# Altium PCB PCB1.PcbDoc
Units mil, origin at the board's own origin, x right, y up, seen from the top; angles counter-clockwise.
Board outline 6000 x 4000 mil, 2 copper layers (Top Layer, Bottom Layer); 173 components, 160 nets, 974 pads, 0 vias.
Unrouted connection lines stored in the file: 630.
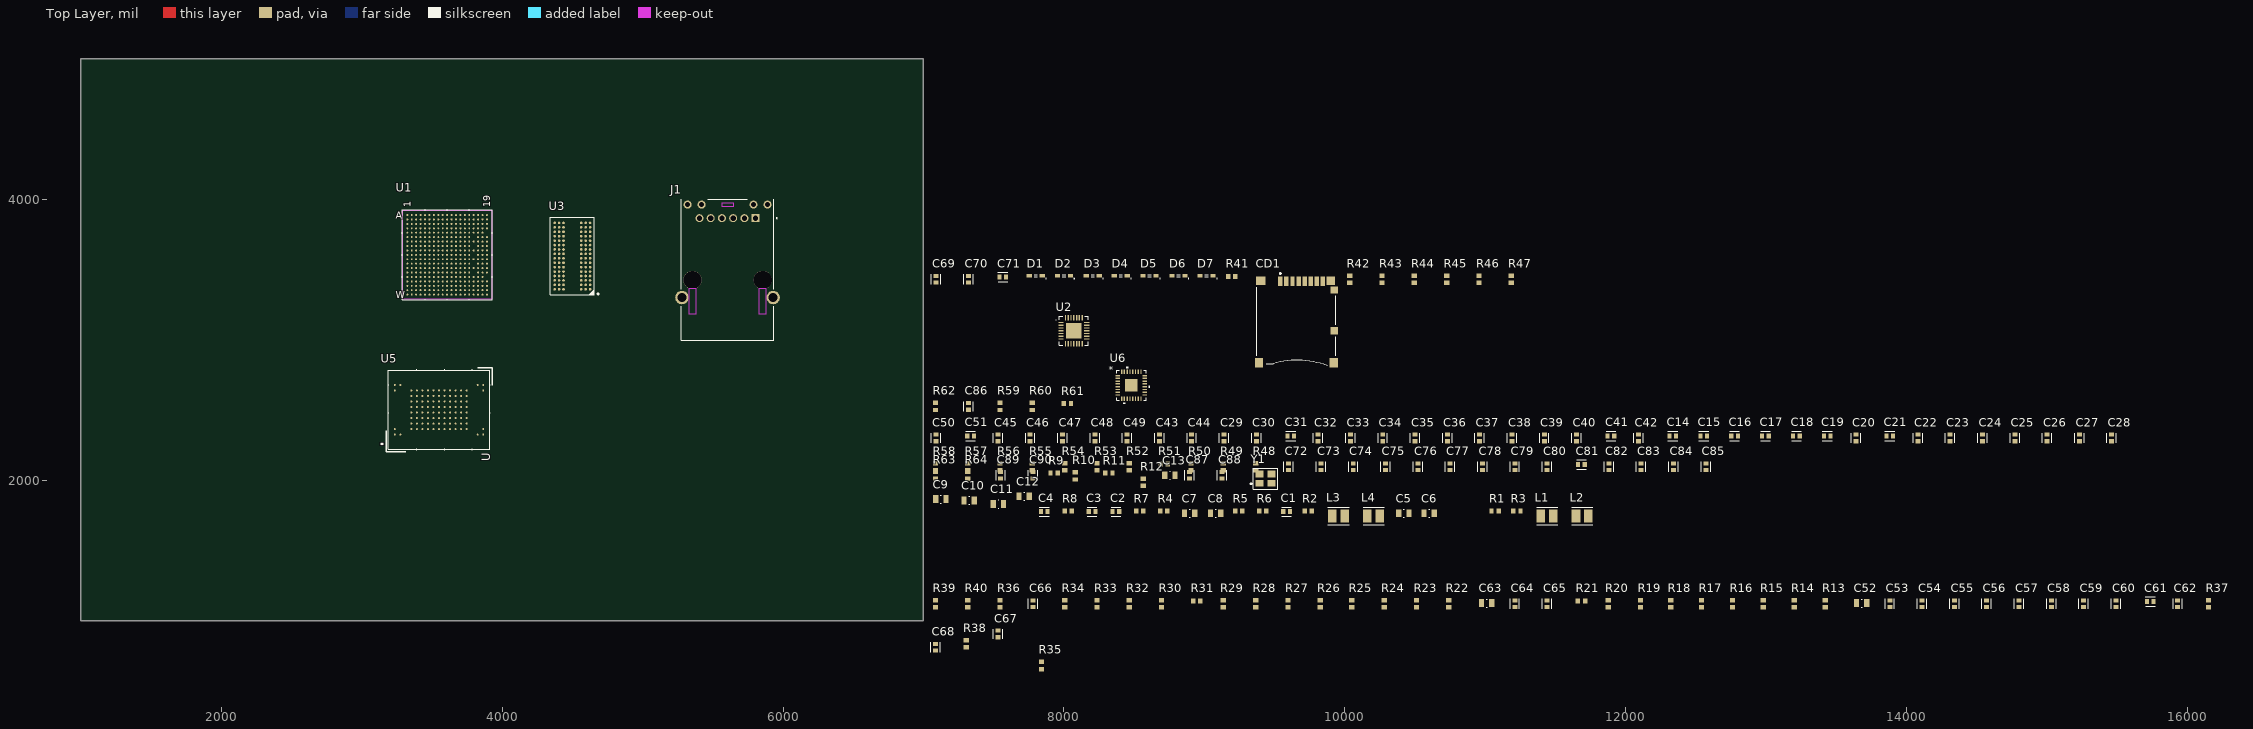
[diagram p0: Top Layer view]
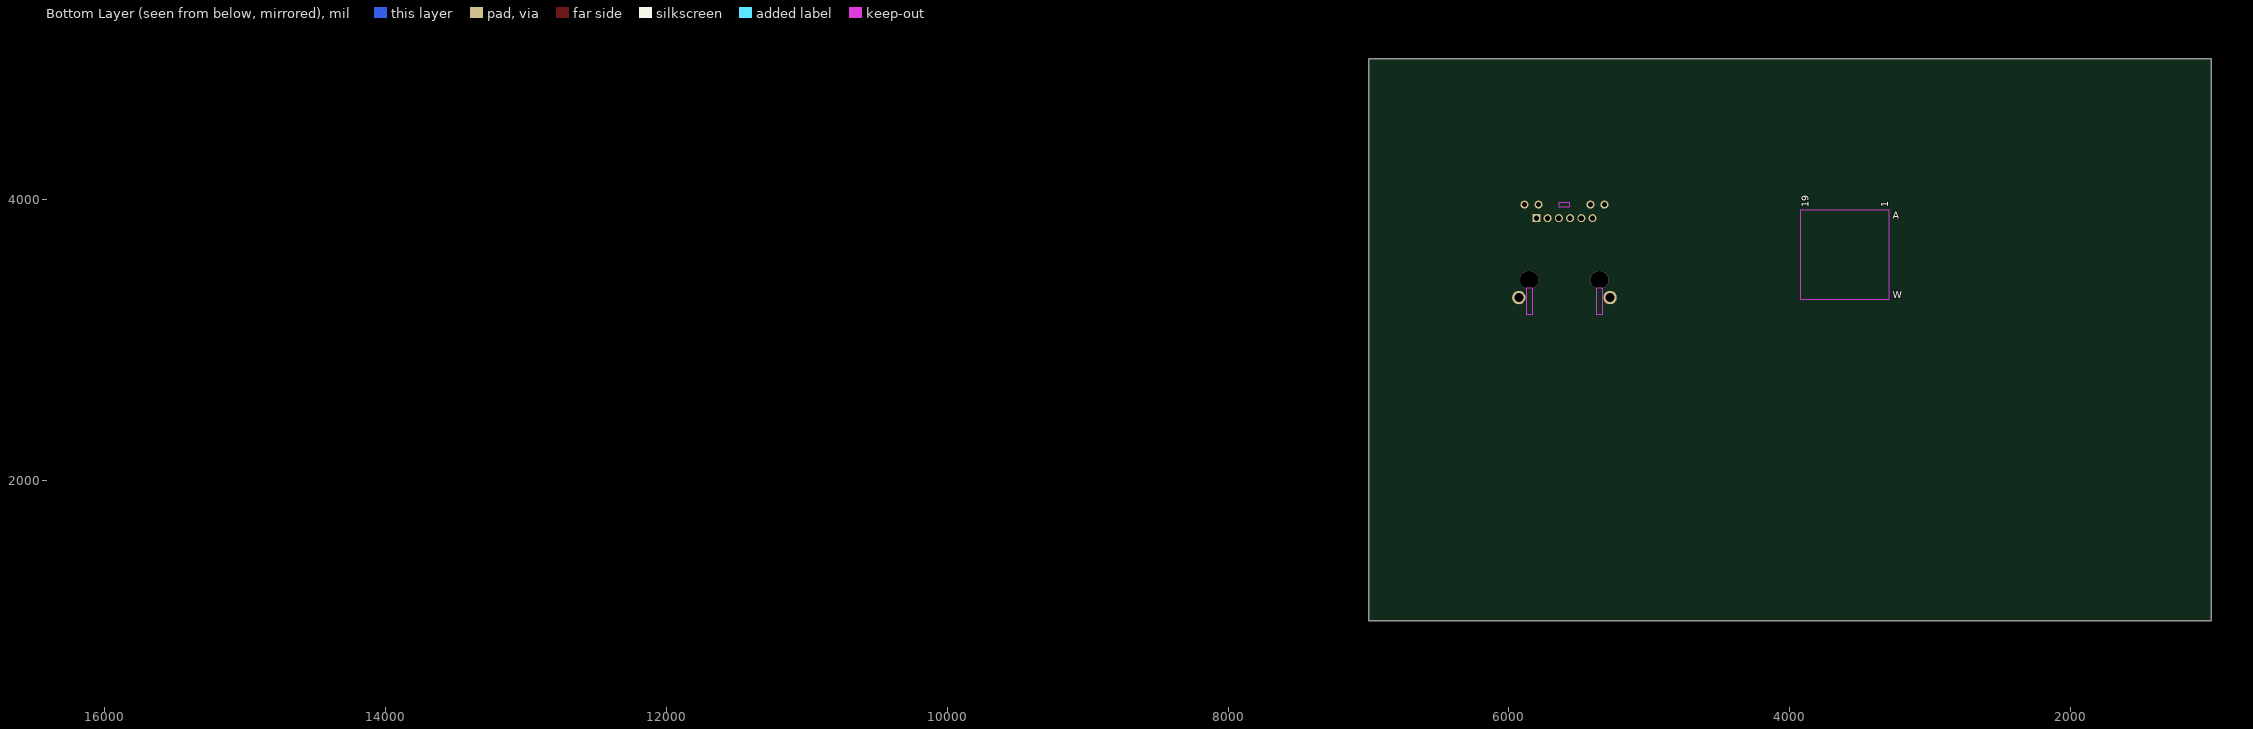
[diagram p1: Bottom Layer view, seen from below]

## Layer stack, top to bottom
Top Solder: solder mask 0.4, Solder Resist, Dk 3.5
Top Layer: signal copper 1.4
Dielectric 1: dielectric 12.6, FR-4, Dk 4.8
Bottom Layer: signal copper 1.4
Bottom Solder: solder mask 0.4, Solder Resist, Dk 3.5

## Board outline
1000,1000 7000,1000 7000,5000 1000,5000

## Design rules (kind name [scope] priority, off if disabled: settings)
Clearance [All] p1: gap=10 ignorepadtopadclearanceinfootprint=FALSE
DiffPairsRouting [All] p1: maxlimit=10 minlimit=10 mostfreqgap=10 toplayer_minwidth=15 toplayer_maxwidth=15 toplayer_prefwidth=15 bottomlayer_minwidth=15 bottomlayer_maxwidth=15 bottomlayer_prefwidth=15 maxuncoupledlength=500
PolygonConnect [All] p1: connectstyle=Relief reliefconductorwidth=10 reliefentries=4 polygonreliefangle="90 Angle" airgapwidth=10
RoutingVias [All] p1: holewidth=28 width=50 viastyle="Through Hole" minholewidth=28 minwidth=50 maxholewidth=28 maxwidth=50
SolderMaskExpansion [All] p1: expansion=4 istentingtop=FALSE
SupplyNets "Schematic Supply Nets_7" [InNet('VCC')] p1: voltage=0.000
SupplyNets "Schematic Supply Nets_6" [InNet('+5V')] p2: voltage=0.000
SupplyNets "Schematic Supply Nets_5" [InNet('0.675V')] p3: voltage=0.000
SupplyNets "Schematic Supply Nets_4" [InNet('GND')] p4: voltage=0.000
SupplyNets "Schematic Supply Nets_3" [InNet('1V8')] p5: voltage=0.000
SupplyNets "Schematic Supply Nets_2" [InNet('3V3')] p6: voltage=0.000
SupplyNets "Schematic Supply Nets_1" [InNet('1V35')] p7: voltage=0.000
SupplyNets "Schematic Supply Nets" [InNet('1V2')] p8: voltage=0.000
Width [All] p1: maxlimit=10 minlimit=10 preferedwidth=10
29 further rules are at their usual default settings.

## Classes and differential pairs
component class MicroSD: C69 C70 C71 CD1 D1 D2 D3 D4 D5 D6 D7 R41 R42 R43 R44 R45 R46 R47
component class Ethernet: C86 C87 C88 C89 C90 J1 R59 R60 R61 R62 R63 R64 U6 Y1
component class eMMC: C72 C73 C74 C75 C76 C77 C78 C79 C80 C81 C82 C83 C84 C85 R48 R49 R50 R51 R52 R53 R54 R55 R56 R57 R58 U5
component class "STM32 Decoupling": C14 C15 C16 C17 C18 C19 C20 C21 C22 C23 C24 C25 C26 C27 C28 C29 C30 C31 C32 C33 C34 C35 C36 C37 C38 C39 C40 C41 C42 C43 C44 C45 C46 C47 C48 C49 C50 C51
component class DDR3: C52 C53 C54 C55 C56 C57 C58 C59 C60 C61 C62 C63 C64 C65 C66 C67 C68 R13 R14 R15 R16 R17 R18 R19 R20 R21 R22 R23 R24 R25 R26 R27 R28 R29 R30 R31 R32 R33 R34 R35 R36 R37 R38 R39 R40 U1 U3
component class Power: C1 C2 C3 C4 C5 C6 C7 C8 C9 C10 C11 C12 C13 L1 L2 L3 L4 R1 R2 R3 R4 R5 R6 R7 R8 R9 R10 R11 R12 U2
differential pair USB2_D: +USB2_D_P -USB2_D_N
differential pair USB1_D: +USB1_D_P -USB1_D_N
differential pair RJ_TD: +RJ_TD_P -RJ_TD_N
differential pair RJ_RD: +RJ_RD_P -RJ_RD_N
differential pair DDR_UDQS: +DDR_UDQS_P -DDR_UDQS_N
differential pair DDR_LDQS: +DDR_LDQS_P -DDR_LDQS_N
differential pair DDR_CLK: +DDR_CLK_P -DDR_CLK_N

## Components (designator, comment, footprint, x,y, rotation, side; value= is the part's Value field where it differs from the comment)
C1 "65p" FP-C0603C-CF-MFG 9585,1775 r0 top value="0.10 μF"
C2 "18p" FP-C0603C-CF-MFG 8370,1775 r0 top value="0.10 μF"
C3 "43p" FP-C0603C-CF-MFG 8200,1775 r0 top value="0.10 μF"
C4 "75p" FP-C0603C-CF-MFG 7860,1775 r0 top value="0.10 μF"
C5 "22u" FP-CC0805-0_85-MFG 10420,1765 r0 top value="100 nF"
C6 "22u" FP-CC0805-0_85-MFG 10600,1765 r0 top value="100 nF"
C7 "22u" FP-CC0805-0_85-MFG 8895,1765 r0 top value="100 nF"
C8 "22u" FP-CC0805-0_85-MFG 9080,1765 r0 top value="100 nF"
C9 "2u2" FP-CC0805-0_85-MFG 7123.58,1865 r0 top value="100 nF"
C10 "2u2" FP-CC0805-0_85-MFG 7325,1855 r0 top value="100 nF"
C11 "2u2" FP-CC0805-0_85-MFG 7533.58,1830 r0 top value="100 nF"
C12 "2u2" FP-CC0805-0_85-MFG 7716.42,1885 r0 top value="100 nF"
C13 "2u2" FP-CC0805-0_85-MFG 8755,2035 r0 top value="100 nF"
C14 "1u" FP-C0603C-CF-MFG 12335,2315 r0 top value="0.10 μF"
C15 "1u" FP-C0603C-CF-MFG 12555,2315 r0 top value="0.10 μF"
C16 "1u" FP-C0603C-CF-MFG 12775,2315 r0 top value="0.10 μF"
C17 "1u" FP-C0603C-CF-MFG 12995,2315 r0 top value="0.10 μF"
C18 "1u" FP-C0603C-CF-MFG 13215,2315 r0 top value="0.10 μF"
C19 "1u" FP-C0603C-CF-MFG 13435,2315 r0 top value="0.10 μF"
C20 "1u" FP-C0603C-CF-MFG 13640,2300 r90 top value="0.10 μF"
C21 "1u" FP-C0603C-CF-MFG 13880,2315 r0 top value="0.10 μF"
C22 "1u" FP-C0603C-CF-MFG 14080,2300 r90 top value="0.10 μF"
C23 "1u" FP-C0603C-CF-MFG 14310,2300 r90 top value="0.10 μF"
C24 "1u" FP-C0603C-CF-MFG 14540,2300 r90 top value="0.10 μF"
C25 "1u" FP-C0603C-CF-MFG 14770,2300 r90 top value="0.10 μF"
C26 "1u" FP-C0603C-CF-MFG 15000,2300 r90 top value="0.10 μF"
C27 "1u" FP-C0603C-CF-MFG 15230,2300 r90 top value="0.10 μF"
C28 "1u" FP-C0603C-CF-MFG 15460,2300 r90 top value="0.10 μF"
C29 "1n" FP-C0603C-CF-MFG 9140,2300 r90 top value="0.10 μF"
C30 "1n" FP-C0603C-CF-MFG 9370,2300 r90 top value="0.10 μF"
C31 "1u" FP-C0603C-CF-MFG 9615,2315 r0 top value="0.10 μF"
C32 "1u" FP-C0603C-CF-MFG 9810,2300 r90 top value="0.10 μF"
C33 "1u" FP-C0603C-CF-MFG 10040,2300 r90 top value="0.10 μF"
C34 "1u" FP-C0603C-CF-MFG 10270,2300 r90 top value="0.10 μF"
C35 "100n" FP-C0603C-CF-MFG 10500,2300 r90 top value="0.10 μF"
C36 "1u" FP-C0603C-CF-MFG 10730,2300 r90 top value="0.10 μF"
C37 "1u" FP-C0603C-CF-MFG 10960,2300 r90 top value="0.10 μF"
C38 "1u" FP-C0603C-CF-MFG 11190,2300 r90 top value="0.10 μF"
C39 "1u" FP-C0603C-CF-MFG 11420,2300 r90 top value="0.10 μF"
C40 "1u" FP-C0603C-CF-MFG 11650,2300 r90 top value="0.10 μF"
C41 "1u" FP-C0603C-CF-MFG 11895,2315 r0 top value="0.10 μF"
C42 "1u" FP-C0603C-CF-MFG 12090,2300 r90 top value="0.10 μF"
C43 "1u" FP-C0603C-CF-MFG 8680,2300 r90 top value="0.10 μF"
C44 "100n" FP-C0603C-CF-MFG 8910,2300 r90 top value="0.10 μF"
C45 "2u2" FP-C0603C-CF-MFG 7530,2300 r90 top value="0.10 μF"
C46 "2u2" FP-C0603C-CF-MFG 7760,2300 r90 top value="0.10 μF"
C47 "1u" FP-C0603C-CF-MFG 7990,2300 r90 top value="0.10 μF"
C48 "2u2" FP-C0603C-CF-MFG 8220,2300 r90 top value="0.10 μF"
C49 "1u" FP-C0603C-CF-MFG 8450,2300 r90 top value="0.10 μF"
C50 "1u" FP-C0603C-CF-MFG 7090,2300 r90 top value="0.10 μF"
C51 "100n" FP-C0603C-CF-MFG 7335,2315 r0 top value="0.10 μF"
C52 "10u" FP-CC0805-0_85-MFG 13680,1125 r0 top value="100 nF"
C53 "100n" FP-C0603C-CF-MFG 13880,1120 r90 top value="0.10 μF"
C54 "100n" FP-C0603C-CF-MFG 14110,1120 r90 top value="0.10 μF"
C55 "100n" FP-C0603C-CF-MFG 14340,1120 r90 top value="0.10 μF"
C56 "100n" FP-C0603C-CF-MFG 14570,1120 r90 top value="0.10 μF"
C57 "100n" FP-C0603C-CF-MFG 14800,1120 r90 top value="0.10 μF"
C58 "100n" FP-C0603C-CF-MFG 15030,1120 r90 top value="0.10 μF"
C59 "100n" FP-C0603C-CF-MFG 15260,1120 r90 top value="0.10 μF"
C60 "100n" FP-C0603C-CF-MFG 15490,1120 r90 top value="0.10 μF"
C61 "100n" FP-C0603C-CF-MFG 15735,1135 r0 top value="0.10 μF"
C62 "100n" FP-C0603C-CF-MFG 15930,1120 r90 top value="0.10 μF"
C63 "10u" FP-CC0805-0_85-MFG 11010,1125 r0 top value="100 nF"
C64 "100n" FP-C0603C-CF-MFG 11210,1120 r90 top value="0.10 μF"
C65 "100n" FP-C0603C-CF-MFG 11440,1120 r90 top value="0.10 μF"
C66 "100n" FP-C0603C-CF-MFG 7780,1120 r90 top value="0.10 μF"
C67 "100n" FP-C0603C-CF-MFG 7530,905 r90 top value="0.10 μF"
C68 "10n" FP-C0603C-CF-MFG 7085,810 r90 top value="0.10 μF"
C69 "0.1u" FP-C0603C-CF-MFG 7090,3430 r90 top value="0.10 μF"
C70 "0.1u" FP-C0603C-CF-MFG 7320,3430 r90 top value="0.10 μF"
C71 "0.1u" FP-C0603C-CF-MFG 7565,3445 r0 top value="0.10 μF"
C72 "0.1u" FP-C0603C-CF-MFG 9600,2095 r90 top value="0.10 μF"
C73 "0.1u" FP-C0603C-CF-MFG 9830,2095 r90 top value="0.10 μF"
C74 "0.1u" FP-C0603C-CF-MFG 10060,2095 r90 top value="0.10 μF"
C75 "0.1u" FP-C0603C-CF-MFG 10290,2095 r90 top value="0.10 μF"
C76 "0.1u" FP-C0603C-CF-MFG 10520,2095 r90 top value="0.10 μF"
C77 "0.1u" FP-C0603C-CF-MFG 10750,2095 r90 top value="0.10 μF"
C78 "0.1u" FP-C0603C-CF-MFG 10980,2095 r90 top value="0.10 μF"
C79 "0.1u" FP-C0603C-CF-MFG 11210,2095 r90 top value="0.10 μF"
C80 "0.1u" FP-C0603C-CF-MFG 11440,2095 r90 top value="0.10 μF"
C81 "0.1u" FP-C0603C-CF-MFG 11685,2110 r0 top value="0.10 μF"
C82 "0.1u" FP-C0603C-CF-MFG 11880,2095 r90 top value="0.10 μF"
C83 "0.1u" FP-C0603C-CF-MFG 12110,2095 r90 top value="0.10 μF"
C84 "0.1u" FP-C0603C-CF-MFG 12340,2095 r90 top value="0.10 μF"
C85 "0.1u" FP-C0603C-CF-MFG 12570,2095 r90 top value="0.10 μF"
C86 "2n" FP-C0603C-CF-MFG 7320,2525 r90 top value="0.10 μF"
C87 "75p" FP-C0603C-CF-MFG 8895,2035 r90 top value="0.10 μF"
C88 "75p" FP-C0603C-CF-MFG 9125,2035 r90 top value="0.10 μF"
C89 "2n" FP-C0603C-CF-MFG 7550,2035 r90 top value="0.10 μF"
C90 "2n" FP-C0603C-CF-MFG 7780,2035 r90 top value="0.10 μF"
CD1 "502774-0891" MOLX-502774-0891_V 9655,3125 r0 top
D1 "DESD5V0U1BA-7" SOD-323 7800,3455 r0 top
D2 "DESD5V0U1BA-7" SOD-323 8000,3455 r0 top
D3 "DESD5V0U1BA-7" SOD-323 8205,3455 r0 top
D4 "DESD5V0U1BA-7" SOD-323 8405,3455 r0 top
D5 "DESD5V0U1BA-7" SOD-323 8610,3455 r0 top
D6 "DESD5V0U1BA-7" SOD-323 8815,3455 r0 top
D7 "DESD5V0U1BA-7" SOD-323 9015,3455 r0 top
J1 "RJMG163118101NR" AMPHENOL_RJMG163118101NR 5605,3425 r0 top
L1 "1u5" FP-LQM2HPN_G0-IPC_A 11440,1745 r0 top
L2 "1u5" FP-LQM2HPN_G0-IPC_A 11690,1745 r0 top
L3 "1u5" FP-LQM2HPN_G0-IPC_A 9955,1745 r0 top
L4 "1u5" FP-LQM2HPN_G0-IPC_A 10205,1745 r0 top
R1 "15k6" RESC1609X50X30NL8T20 11070,1780 r0 top
R2 "68k" RESC1609X50X30NL8T20 9740,1780 r0 top
R3 "54k4" RESC1609X50X30NL8T20 11225,1780 r0 top
R4 "68k" RESC1609X50X30NL8T20 8710,1780 r0 top
R5 "13k6" RESC1609X50X30NL8T20 9245,1780 r0 top
R6 "24k" RESC1609X50X30NL8T20 9415,1780 r0 top
R7 "68k" RESC1609X50X30NL8T20 8540,1780 r0 top
R8 "68k" RESC1609X50X30NL8T20 8030,1780 r0 top
R9 "20k" RESC1609X50X30NL8T20 7930,2050 r0 top
R10 "20k" RESC1609X50X30NL8T20 8080,2030 r90 top
R11 "20k" RESC1609X50X30NL8T20 8320,2050 r0 top
R12 "20k" RESC1609X50X30NL8T20 8565,1984.41 r90 top
R13 "33" RESC1609X50X30NL8T20 13420,1120 r90 top
R14 "33" RESC1609X50X30NL8T20 13200,1120 r90 top
R15 "33" RESC1609X50X30NL8T20 12980,1120 r90 top
R16 "33" RESC1609X50X30NL8T20 12760,1120 r90 top
R17 "33" RESC1609X50X30NL8T20 12540,1120 r90 top
R18 "33" RESC1609X50X30NL8T20 12320,1120 r90 top
R19 "33" RESC1609X50X30NL8T20 12105,1120 r90 top
R20 "33" RESC1609X50X30NL8T20 11875,1120 r90 top
R21 "33" RESC1609X50X30NL8T20 11685,1140 r0 top
R22 "33" RESC1609X50X30NL8T20 10740,1120 r90 top
R23 "33" RESC1609X50X30NL8T20 10510,1120 r90 top
R24 "33" RESC1609X50X30NL8T20 10280,1120 r90 top
R25 "33" RESC1609X50X30NL8T20 10050,1120 r90 top
R26 "33" RESC1609X50X30NL8T20 9825,1120 r90 top
R27 "33" RESC1609X50X30NL8T20 9595,1120 r90 top
R28 "33" RESC1609X50X30NL8T20 9365,1120 r90 top
R29 "100" RESC1609X50X30NL8T20 9135,1120 r90 top
R30 "33" RESC1609X50X30NL8T20 8695,1120 r90 top
R31 "33" RESC1609X50X30NL8T20 8945,1140 r0 top
R32 "33" RESC1609X50X30NL8T20 8465,1120 r90 top
R33 "33" RESC1609X50X30NL8T20 8235,1120 r90 top
R34 "33" RESC1609X50X30NL8T20 8005,1120 r90 top
R35 "33" RESC1609X50X30NL8T20 7840,680 r90 top
R36 "240" RESC1609X50X30NL8T20 7545,1120 r90 top
R37 "240" RESC1609X50X30NL8T20 16150,1120 r90 top
R38 "10k" RESC1609X50X30NL8T20 7305,834.41 r90 top
R39 "10k" RESC1609X50X30NL8T20 7085,1120 r90 top
R40 "240" RESC1609X50X30NL8T20 7315,1120 r90 top
R41 "4.7k" RESC1609X50X30NL8T20 9195,3450 r0 top
R42 "4.7k" RESC1609X50X30NL8T20 10035,3430 r90 top
R43 "4.7k" RESC1609X50X30NL8T20 10265,3430 r90 top
R44 "4.7k" RESC1609X50X30NL8T20 10495,3430 r90 top
R45 "4.7k" RESC1609X50X30NL8T20 10725,3430 r90 top
R46 "4.7k" RESC1609X50X30NL8T20 10955,3430 r90 top
R47 "4.7k" RESC1609X50X30NL8T20 11185,3430 r90 top
R48 "4.7k" RESC1609X50X30NL8T20 9365,2095 r90 top
R49 "4.7k" RESC1609X50X30NL8T20 9135,2095 r90 top
R50 "4.7k" RESC1609X50X30NL8T20 8905,2095 r90 top
R51 "4.7k" RESC1609X50X30NL8T20 8715,2115 r0 top
R52 "4.7k" RESC1609X50X30NL8T20 8465,2095 r90 top
R53 "4.7k" RESC1609X50X30NL8T20 8235,2095 r90 top
R54 "4.7k" RESC1609X50X30NL8T20 8005,2095 r90 top
R55 "4.7k" RESC1609X50X30NL8T20 7775,2095 r90 top
R56 "4.7k" RESC1609X50X30NL8T20 7545,2095 r90 top
R57 "4.7k" RESC1609X50X30NL8T20 7315,2095 r90 top
R58 "4.7k" RESC1609X50X30NL8T20 7085,2095 r90 top
R59 "4.7k" RESC1609X50X30NL8T20 7545,2525 r90 top
R60 "4.7k" RESC1609X50X30NL8T20 7775,2525 r90 top
R61 "4.7k" RESC1609X50X30NL8T20 8025,2545 r0 top
R62 "4.7k" RESC1609X50X30NL8T20 7085,2525 r90 top
R63 "510" RESC1609X50X30NL8T20 7085,2035 r90 top
R64 "510" RESC1609X50X30NL8T20 7315,2035 r90 top
U1 "STM32MP151AAB3" LFBGA354_16X16_STM 3608.5,3604.02 r0 top
U2 "MAX20029CATIAV+" "QUADBUCK QFN28" 8070.31,3063.5 r0 top
U3 "MT41K64M16TW-107 IT:J" MICT-TW-96 4500,3595 r180 top
U5 "IS21ES08GA-JQLI-TR" FBGA100_ISI 3550.63,2500.95 r90 top
U6 "DP83826IRHBR" VQFN32_RHB_TEX 8480,2675 r0 top
Y1 "7M-25.000MEEQ-T" FP-7M-MFG 9435,2010 r0 top

## Footprints (in the part's own frame and the unit in brackets; to place one, negate y for a bottom-side part, rotate by r counter-clockwise, add the part's x,y. Pads: shape width x height; smd on the part's side, far side on the other; paste and mask are expansions set on the pad)
AMPHENOL_RJMG163118101NR [mm]
  round 1.448 hole 0.94: L1(7.23,13.63) L2(4.69,13.63) L3(-4.69,13.63) L4(-7.23,13.63) R2(3.045,11.18) R3(1.015,11.18) R4(-1.015,11.18) R5(-3.045,11.18) R6(-5.075,11.18)
  rect 1.448x1.448 hole 0.94: R1(5.075,11.18)
  round 2.43 hole 1.62: S1(-8.25,-3.18) S2(8.25,-3.18)
  round 3.3 hole 3.3 unplated: ""(-6.35,0) ""(6.35,0)
  Keep-Out Layer region: 1,13.2 -1,13.2 -1,14 1,14
  Keep-Out Layer region: 6.95,-6.2 5.75,-6.2 5.75,-1.5 6.95,-1.5
  Keep-Out Layer region: -5.75,-6.2 -6.95,-6.2 -6.95,-1.5 -5.75,-1.5
  silkscreen extent -8.35,-10.86 9,14.57
FBGA100_ISI [mil]
  round 14 smd paste+0 mask+0: A1(-177.16,314.96) A2(-137.8,314.96) A9(137.79,314.96) A10(177.16,314.96) B1(-177.16,275.59) B10(177.16,275.59) D2(-137.8,196.85) D3(-98.43,196.85) D4(-59.06,196.85) D5(-19.68,196.85) D6(19.68,196.85) D7(59.05,196.85) D8(98.42,196.85) D9(137.79,196.85) E2(-137.8,157.48) E3(-98.43,157.48) E4(-59.06,157.48) E5(-19.68,157.48) E6(19.68,157.48) E7(59.05,157.48) E8(98.42,157.48) E9(137.79,157.48) F2(-137.8,118.11) F3(-98.43,118.11) F4(-59.06,118.11) F5(-19.68,118.11) F6(19.68,118.11) F7(59.05,118.11) F8(98.42,118.11) F9(137.79,118.11) G2(-137.8,78.74) G3(-98.43,78.74) G4(-59.06,78.74) G5(-19.68,78.74) G6(19.68,78.74) G7(59.05,78.74) G8(98.42,78.74) G9(137.79,78.74) H2(-137.8,39.37) H3(-98.43,39.37) H4(-59.06,39.37) H5(-19.68,39.37) H6(19.68,39.37) H7(59.05,39.37) H8(98.42,39.37) H9(137.79,39.37) J2(-137.8,0) J3(-98.43,0) J4(-59.06,0) J5(-19.68,0) J6(19.68,0) J7(59.05,0) J8(98.42,0) J9(137.79,0) K2(-137.8,-39.37) K3(-98.43,-39.37) K4(-59.06,-39.37) K5(-19.68,-39.37) K6(19.68,-39.37) K7(59.05,-39.37) K8(98.42,-39.37) K9(137.79,-39.37) L2(-137.8,-78.74) L3(-98.43,-78.74) L4(-59.06,-78.74) L5(-19.68,-78.74) L6(19.68,-78.74) L7(59.05,-78.74) L8(98.42,-78.74) L9(137.79,-78.74) M2(-137.8,-118.11) M3(-98.43,-118.11) M4(-59.06,-118.11) M5(-19.68,-118.11) M6(19.68,-118.11) M7(59.05,-118.11) M8(98.42,-118.11) M9(137.79,-118.11) N2(-137.8,-157.48) N3(-98.43,-157.48) N4(-59.06,-157.48) N5(-19.68,-157.48) N6(19.68,-157.48) N7(59.05,-157.48) N8(98.42,-157.48) N9(137.79,-157.48) P2(-137.8,-196.85) P3(-98.43,-196.85) P4(-59.06,-196.85) P5(-19.68,-196.85) P6(19.68,-196.85) P7(59.05,-196.85) P8(98.42,-196.85) P9(137.79,-196.85) T1(-177.16,-275.59) T10(177.16,-275.59) U1(-177.16,-314.96) U2(-137.8,-314.96) U9(137.79,-314.96) U10(177.16,-314.96)
  silkscreen extent -300,-380 300,375, body extent -277,-356 277,356, height 55
FP-7M-MFG [mm]
  rect 1.4x1.2 smd paste+0 mask+0: 1(-1.1,-0.85) 2(1.1,-0.85) 3(1.1,0.85) 4(-1.1,0.85)
  silkscreen extent -2.75,-1.9 2.25,1.9, body extent -1.9,-1.55 1.9,1.55, height 0.25
FP-C0603C-CF-MFG [mm]
  rect 0.75x0.9 smd paste+0 mask+0: 1(-0.6,0) 2(0.6,0)
  silkscreen extent -0.87,-0.85 0.88,0.85, body extent -1.2,-0.6 1.2,0.6, height 0.25
FP-CC0805-0_85-MFG [mm]
  rect 0.95x1.4 smd paste+0 mask+0: 1(-0.925,0) 2(0.925,0)
  silkscreen extent -0.08,-0.72 0.08,0.72, body extent -1.6,-1.05 1.6,1.05, height 0.25
FP-LQM2HPN_G0-IPC_A [mil]
  rect 61.22x90.8 smd paste+0 mask+0: 1(-44.32,0) 2(44.32,0)
  silkscreen extent -75,-61 75,61, body extent -95,-65 95,65, height 10
LFBGA354_16X16_STM [mil]
  round 14 smd paste+0 mask+0: A1(-283.46,283.46) A2(-251.97,283.46) A3(-220.47,283.46) A4(-188.98,283.46) A5(-157.48,283.46) A6(-125.98,283.46) A7(-94.49,283.46) A8(-62.99,283.46) A9(-31.5,283.46) A10(0,283.46) A11(31.5,283.46) A12(62.99,283.46) A13(94.49,283.46) A14(125.98,283.46) A15(157.48,283.46) A16(188.98,283.46) A17(220.47,283.46) A18(251.97,283.46) A19(283.46,283.46) B1(-283.46,251.97) B2(-251.97,251.97) B3(-220.47,251.97) B4(-188.98,251.97) B5(-157.48,251.97) B6(-125.98,251.97) B7(-94.49,251.97) B8(-62.99,251.97) B9(-31.5,251.97) B10(0,251.97) B11(31.5,251.97) B12(62.99,251.97) B13(94.49,251.97) B14(125.98,251.97) B15(157.48,251.97) B16(188.98,251.97) B17(220.47,251.97) B18(251.97,251.97) B19(283.46,251.97) C1(-283.46,220.47) C2(-251.97,220.47) C3(-220.47,220.47) C4(-188.98,220.47) C5(-157.48,220.47) C6(-125.98,220.47) C7(-94.49,220.47) C8(-62.99,220.47) C9(-31.5,220.47) C10(0,220.47) C11(31.5,220.47) C12(62.99,220.47) C13(94.49,220.47) C14(125.98,220.47) C15(157.48,220.47) C16(188.98,220.47) C17(220.47,220.47) C18(251.97,220.47) C19(283.46,220.47) D1(-283.46,188.98) D2(-251.97,188.98) D3(-220.47,188.98) D4(-188.98,188.98) D5(-157.48,188.98) D6(-125.98,188.98) D7(-94.49,188.98) D8(-62.99,188.98) D9(-31.5,188.98) D10(0,188.98) D11(31.5,188.98) D12(62.99,188.98) D13(94.49,188.98) D14(125.98,188.98) D15(157.48,188.98) D16(188.98,188.98) D17(220.47,188.98) D18(251.97,188.98) D19(283.46,188.98) E1(-283.46,157.48) E2(-251.97,157.48) E3(-220.47,157.48) E4(-188.98,157.48) E5(-157.48,157.48) E6(-125.98,157.48) E7(-94.49,157.48) E8(-62.99,157.48) E9(-31.5,157.48) E10(0,157.48) E11(31.5,157.48) E12(62.99,157.48) E13(94.49,157.48) E14(125.98,157.48) E15(157.48,157.48) E16(188.98,157.48) E17(220.47,157.48) E18(251.97,157.48) F1(-283.46,125.98) F2(-251.97,125.98) F3(-220.47,125.98) F4(-188.98,125.98) F5(-157.48,125.98) F6(-125.98,125.98) F7(-94.49,125.98) F8(-62.99,125.98) F9(-31.5,125.98) F10(0,125.98) F11(31.5,125.98) F12(62.99,125.98) F13(94.49,125.98) F14(125.98,125.98) F15(157.48,125.98) F17(220.47,125.98) F18(251.97,125.98) F19(283.46,125.98) G1(-283.46,94.49) G2(-251.97,94.49) G3(-220.47,94.49) G4(-188.98,94.49) G5(-157.48,94.49) G6(-125.98,94.49) G7(-94.49,94.49) G8(-62.99,94.49) G9(-31.5,94.49) G10(0,94.49) G11(31.5,94.49) G12(62.99,94.49) G13(94.49,94.49) G14(125.98,94.49) G15(157.48,94.49) G16(188.98,94.49) G17(220.47,94.49) G18(251.97,94.49) G19(283.46,94.49) H1(-283.46,62.99) H2(-251.97,62.99) H3(-220.47,62.99) H4(-188.98,62.99) H5(-157.48,62.99) H6(-125.98,62.99) H7(-94.49,62.99) H8(-62.99,62.99) H9(-31.5,62.99) H10(0,62.99) H11(31.5,62.99) H12(62.99,62.99) H13(94.49,62.99) H14(125.98,62.99) H15(157.48,62.99) H17(220.47,62.99) H18(251.97,62.99) H19(283.46,62.99) J1(-283.46,31.5) J2(-251.97,31.5) J3(-220.47,31.5) J4(-188.98,31.5) J5(-157.48,31.5) J6(-125.98,31.5) J7(-94.49,31.5) J8(-62.99,31.5) J9(-31.5,31.5) J10(0,31.5) J11(31.5,31.5) J12(62.99,31.5) J13(94.49,31.5) J14(125.98,31.5) J15(157.48,31.5) J16(188.98,31.5) J17(220.47,31.5) J18(251.97,31.5) J19(283.46,31.5) K1(-283.46,0) K2(-251.97,0) K3(-220.47,0) K4(-188.98,0) K5(-157.48,0) K6(-125.98,0) K7(-94.49,0) K8(-62.99,0) K9(-31.5,0) K10(0,0) K11(31.5,0) K12(62.99,0) K13(94.49,0) K14(125.98,0) K15(157.48,0) K17(220.47,0) K18(251.97,0) K19(283.46,0) L1(-283.46,-31.5) L2(-251.97,-31.5) L3(-220.47,-31.5) L4(-188.98,-31.5) L5(-157.48,-31.5) L6(-125.98,-31.5) L7(-94.49,-31.5) L8(-62.99,-31.5) L9(-31.5,-31.5) L10(0,-31.5) L11(31.5,-31.5) L12(62.99,-31.5) L13(94.49,-31.5) L14(125.98,-31.5) L15(157.48,-31.5) L16(188.98,-31.5) L17(220.47,-31.5) L18(251.97,-31.5) L19(283.46,-31.5) M1(-283.46,-62.99) M2(-251.97,-62.99) M3(-220.47,-62.99) M4(-188.98,-62.99) M5(-157.48,-62.99) M6(-125.98,-62.99) M7(-94.49,-62.99) M8(-62.99,-62.99) M9(-31.5,-62.99) M10(0,-62.99) M11(31.5,-62.99) M12(62.99,-62.99) M13(94.49,-62.99) M14(125.98,-62.99) M15(157.48,-62.99) M17(220.47,-62.99) M18(251.97,-62.99) M19(283.46,-62.99) N1(-283.46,-94.49) N2(-251.97,-94.49) N3(-220.47,-94.49) N4(-188.98,-94.49) N5(-157.48,-94.49) N6(-125.98,-94.49) N7(-94.49,-94.49) N8(-62.99,-94.49) N9(-31.5,-94.49) N10(0,-94.49) N11(31.5,-94.49) N12(62.99,-94.49) N13(94.49,-94.49) N14(125.98,-94.49) N15(157.48,-94.49) N16(188.98,-94.49) N17(220.47,-94.49) N18(251.97,-94.49) N19(283.46,-94.49) P1(-283.46,-125.98) P2(-251.97,-125.98) P3(-220.47,-125.98) P4(-188.98,-125.98) P5(-157.48,-125.98) P6(-125.98,-125.98) P7(-94.49,-125.98) P8(-62.99,-125.98) P9(-31.5,-125.98) P10(0,-125.98) P11(31.5,-125.98) P12(62.99,-125.98) P13(94.49,-125.98) P14(125.98,-125.98) P15(157.48,-125.98) P17(220.47,-125.98) P18(251.97,-125.98) P19(283.46,-125.98) R1(-283.46,-157.48) R2(-251.97,-157.48) R3(-220.47,-157.48) R4(-188.98,-157.48) R5(-157.48,-157.48) R6(-125.98,-157.48) R7(-94.49,-157.48) R8(-62.99,-157.48) R9(-31.5,-157.48) R10(0,-157.48) R11(31.5,-157.48) R12(62.99,-157.48) R13(94.49,-157.48) R14(125.98,-157.48) R15(157.48,-157.48) R16(188.98,-157.48) R17(220.47,-157.48) R18(251.97,-157.48) T1(-283.46,-188.98) T2(-251.97,-188.98) T3(-220.47,-188.98) T4(-188.98,-188.98) T5(-157.48,-188.98) T6(-125.98,-188.98) T7(-94.49,-188.98) T8(-62.99,-188.98) T9(-31.5,-188.98) T10(0,-188.98) T11(31.5,-188.98) T12(62.99,-188.98) T13(94.49,-188.98) T14(125.98,-188.98) T15(157.48,-188.98) T16(188.98,-188.98) T17(220.47,-188.98) T18(251.97,-188.98) T19(283.46,-188.98) U1(-283.46,-220.47) U2(-251.97,-220.47) U3(-220.47,-220.47) U4(-188.98,-220.47) U5(-157.48,-220.47) U6(-125.98,-220.47) U7(-94.49,-220.47) U8(-62.99,-220.47) U9(-31.5,-220.47) U10(0,-220.47) U11(31.5,-220.47) U12(62.99,-220.47) U13(94.49,-220.47) U14(125.98,-220.47) U15(157.48,-220.47) U16(188.98,-220.47) U17(220.47,-220.47) U18(251.97,-220.47) U19(283.46,-220.47) V1(-283.46,-251.97) V2(-251.97,-251.97) V3(-220.47,-251.97) V4(-188.98,-251.97) V5(-157.48,-251.97) V6(-125.98,-251.97) V7(-94.49,-251.97) V8(-62.99,-251.97) V9(-31.5,-251.97) V10(0,-251.97) V11(31.5,-251.97) V12(62.99,-251.97) V13(94.49,-251.97) V14(125.98,-251.97) V15(157.48,-251.97) V16(188.98,-251.97) V17(220.47,-251.97) V18(251.97,-251.97) V19(283.46,-251.97) W1(-283.46,-283.46) W2(-251.97,-283.46) W3(-220.47,-283.46) W4(-188.98,-283.46) W5(-157.48,-283.46) W6(-125.98,-283.46) W7(-94.49,-283.46) W8(-62.99,-283.46) W9(-31.5,-283.46) W10(0,-283.46) W11(31.5,-283.46) W12(62.99,-283.46) W13(94.49,-283.46) W14(125.98,-283.46) W15(157.48,-283.46) W16(188.98,-283.46) W17(220.47,-283.46) W18(251.97,-283.46) W19(283.46,-283.46)
  Keep-Out Layer region: -316.71,-316.71 -316.71,316.71 316.71,316.71 316.71,-316.71
  silkscreen extent -325,-325 325,325, body extent -315,-315 315,315, height 51
MICT-TW-96 [mm] "BGA, 96-Balls, Body 8x14mm, Pitch 0.8mm"
  round 0.47 smd mask-0.025: A1(-3.2,6) A2(-2.4,6) A3(-1.6,6) A7(1.6,6) A8(2.4,6) A9(3.2,6) B1(-3.2,5.2) B2(-2.4,5.2) B3(-1.6,5.2) B7(1.6,5.2) B8(2.4,5.2) B9(3.2,5.2) C1(-3.2,4.4) C2(-2.4,4.4) C3(-1.6,4.4) C7(1.6,4.4) C8(2.4,4.4) C9(3.2,4.4) D1(-3.2,3.6) D2(-2.4,3.6) D3(-1.6,3.6) D7(1.6,3.6) D8(2.4,3.6) D9(3.2,3.6) E1(-3.2,2.8) E2(-2.4,2.8) E3(-1.6,2.8) E7(1.6,2.8) E8(2.4,2.8) E9(3.2,2.8) F1(-3.2,2) F2(-2.4,2) F3(-1.6,2) F7(1.6,2) F8(2.4,2) F9(3.2,2) G1(-3.2,1.2) G2(-2.4,1.2) G3(-1.6,1.2) G7(1.6,1.2) G8(2.4,1.2) G9(3.2,1.2) H1(-3.2,0.4) H2(-2.4,0.4) H3(-1.6,0.4) H7(1.6,0.4) H8(2.4,0.4) H9(3.2,0.4) J1(-3.2,-0.4) J2(-2.4,-0.4) J3(-1.6,-0.4) J7(1.6,-0.4) J8(2.4,-0.4) J9(3.2,-0.4) K1(-3.2,-1.2) K2(-2.4,-1.2) K3(-1.6,-1.2) K7(1.6,-1.2) K8(2.4,-1.2) K9(3.2,-1.2) L1(-3.2,-2) L2(-2.4,-2) L3(-1.6,-2) L7(1.6,-2) L8(2.4,-2) L9(3.2,-2) M1(-3.2,-2.8) M2(-2.4,-2.8) M3(-1.6,-2.8) M7(1.6,-2.8) M8(2.4,-2.8) M9(3.2,-2.8) N1(-3.2,-3.6) N2(-2.4,-3.6) N3(-1.6,-3.6) N7(1.6,-3.6) N8(2.4,-3.6) N9(3.2,-3.6) P1(-3.2,-4.4) P2(-2.4,-4.4) P3(-1.6,-4.4) P7(1.6,-4.4) P8(2.4,-4.4) P9(3.2,-4.4) R1(-3.2,-5.2) R2(-2.4,-5.2) R3(-1.6,-5.2) R7(1.6,-5.2) R8(2.4,-5.2) R9(3.2,-5.2) T1(-3.2,-6) T2(-2.4,-6) T3(-1.6,-6) T7(1.6,-6) T8(2.4,-6) T9(3.2,-6)
  silkscreen extent -4.78,-7 4,7, body extent -4,-7 4,7, height 1.2
MOLX-502774-0891_V [mm] "SMD, 14-Leads, Body 15x14.3mm, Pitch 1.1mm"
  rect 0.8x1.68 smd: 1(-2.9,7.385) 2(-1.8,7.385) 3(-0.7,7.385) 4(0.4,7.385) 5(1.5,7.385) 6(2.6,7.385) 7(3.7,7.385) 8(4.8,7.385)
  rect 1.29x1.3 smd: 9(6.855,5.825)
  rect 1.29x1.4 smd: 10(6.855,-1.575)
  rect 1.5x1.7 smd: 11(6.75,-7.375) 12(-6.75,-7.375)
  rect 1.7x1.5 smd: 13(-6.45,7.475)
  rect 1.6x1.5 smd: 14(6.21,7.475)
  silkscreen extent -7.15,-7.88 7.15,8.9, body extent -7.15,-8 7.15,8, height 1.78
"QUADBUCK QFN28" [mil]
  rect 38x10 smd paste+0 mask+0: 1(-91.5,59.06) 2(-91.5,39.37) 3(-91.5,19.68) 4(-91.5,0) 5(-91.5,-19.68) 6(-91.5,-39.37) 7(-91.5,-59.06) 15(91.5,-59.06) 16(91.5,-39.37) 17(91.5,-19.68) 18(91.5,0) 19(91.5,19.68) 20(91.5,39.37) 21(91.5,59.06)
  rect 10x38 smd paste+0 mask+0: 8(-59.06,-91.5) 9(-39.37,-91.5) 10(-19.68,-91.5) 11(0,-91.5) 12(19.69,-91.5) 13(39.37,-91.5) 14(59.06,-91.5) 22(59.06,91.5) 23(39.37,91.5) 24(19.69,91.5) 25(0,91.5) 26(-19.68,91.5) 27(-39.37,91.5) 28(-59.06,91.5)
  rect 110x110 smd paste-55 mask+0: 29(0,0)
  silkscreen extent -104,-104 104,104, body extent -99,-99 99,99, height 32
RESC1609X50X30NL8T20 [mm] "Chip Resistor, 2-Leads, Body 1.65x0.95mm, IPC Medium Density"
  rect 0.8x0.95 smd: 1(-0.65,0) 2(0.65,0)
  body extent -0.82,-0.48 0.82,0.48, height 0.5
SOD-323 [mm] "Chip Diode, 2-Leads, Body 2.70x0.45mm, IPC Medium Density"
  rect 0.95x0.6 smd: 1(-1.175,0) 2(1.175,0)
  silkscreen extent -0.3,-0.56 1.91,0.2, body extent -1.3,-0.67 1.3,0.67, height 1.1
VQFN32_RHB_TEX [mil]
  rect 32x10 smd paste+0 mask+0: 1(-96.5,68.9) 2(-96.5,49.21) 3(-96.5,29.53) 4(-96.5,9.84) 5(-96.5,-9.84) 6(-96.5,-29.53) 7(-96.5,-49.21) 8(-96.5,-68.9) 17(96.5,-68.9) 18(96.5,-49.21) 19(96.5,-29.53) 20(96.5,-9.84) 21(96.5,9.84) 22(96.5,29.53) 23(96.5,49.21) 24(96.5,68.9)
  rect 10x32 smd paste+0 mask+0: 9(-68.9,-96.5) 10(-49.21,-96.5) 11(-29.53,-96.5) 12(-9.84,-96.5) 13(9.84,-96.5) 14(29.53,-96.5) 15(49.21,-96.5) 16(68.9,-96.5) 25(68.9,96.5) 26(49.21,96.5) 27(29.53,96.5) 28(9.84,96.5) 29(-9.84,96.5) 30(-29.53,96.5) 31(-49.21,96.5) 32(-68.9,96.5)
  rect 87x87 smd paste+0 mask+0: 33(0,0)
  silkscreen extent -106,-132 132,132, body extent -101,-101 101,101, height 39

## Part data
C1 C2 C3 C4 C14 C15 C16 C17 C18 C19 C20 C21 C22 C23 C24 C25 C26 C27 C28 C29 C30 C31 C32 C33 C34 C35 C36 C37 C38 C39 C40 C41 C42 C43 C44 C45 C46 C47 C48 C49 C50 C51 C53 C54 C55 C56 C57 C58 C59 C60 C61 C62 C64 C65 C66 C67 C68 C69 C70 C71 C72 C73 C74 C75 C76 C77 C78 C79 C80 C81 C82 C83 C84 C85 C86 C87 C88 C89 C90: library part CMP-2006-03061-2, "CAP CER 0.1UF 50V X7R 0603", Capacitance="0.10 μF", Manufacturer=KEMET, Manufacturer Part Number=C0603C104K5RACTU, Package=C0603C-CF, Temperature="-55°C to +125°C", Temperature Characteristic=X7R, Temperature Coefficient=30ppm/°C, Temperature Range High=+125°C, Temperature Range Low=-55°C, Tolerance=0.1, Voltage Rating="50 V", Automotive=Yes, Automotive Grade="Grade 1", Category=Cap, ComponentLink2Description=Datasheet, ComponentLink2URL=https://api.kemet.com/component-edge/download/datasheet/C0603C100J5GACAUTO.pdf, Device Class L1="Passive Components", Device Class L2=Capacitors, Device Class L3="Ceramic Capacitors", Digikey Description="CAP CER 0.1UF 50V X7R 0603", Height=0.87mm, Lead Free=Yes, Material=Ceramic, Octopart=https://octopart.com/c0603c104k5ractu-kemet-139244, RoHS=TRUE
C5 C6 C7 C8 C9 C10 C11 C12 C13 C52 C63: library part CMP-2100-03606-3, "CAP CER 0.1UF 50V X7R 0805", Capacitance="100 nF", Manufacturer=Yageo, Manufacturer Part Number=CC0805KRX7R9BB104, Package=CC0805-0.85, Temperature="-30°C to +85°C", Temperature Characteristic=X7R, Temperature Range High=+85°C, Temperature Range Low=-30°C, Tolerance=0.1, Voltage Rating="50 V", Automotive=No, Category=Cap, ComponentLink2Description=Datasheet, ComponentLink2URL=http://www.yageo.com/documents/recent/UPY-GPHC_Y5V_6.3V-to-50V_8.pdf, Device Class L1="Passive Components", Device Class L2=Capacitors, Device Class L3="Ceramic Capacitors", Digikey Description="CAP CER 0.1UF 50V X7R 0805", Footprint Url=http://www.yageo.com/exep/pages/download/literatures/UPY-C_GEN_24.pdf, Height=0.95mm, Ipc Land Pattern Name=CAPC200125X85, Lead Free=Yes, Material=Ceramic, Mouser Description="Multilayer Ceramic Capacitors MLCC - SMD/SMT 100nF 50V X7R 10%", Octopart=https://octopart.com/cc0805krx7r9bb104-yageo-192993, RoHS=TRUE
CD1: library part CMP-2000-05248-1, "Micro SD Memory Card Connector, 0.5 A, 10 V (DC), -25 to 85 degC, 8-Pin SMT, RoHS, Tape and Reel", Manufacturer=Molex, Standard Package=1, 3D Model=502774-0891.stp, Card Type=SecureDigital-microSD™, Catalog Drawings=502774-0891, Category=Connectors,Interconnects, Connector Type=ConnectorandEjector, Contact Finish=Gold, Contact Finish Thickness=20µin(0.51µm), Datasheet URL=https://datasheet.ciiva.com/1104/1499551-1104671.pdf, Datasheet Version="Rev. D, 04/2004", Ejector Side=-, Family=MemoryConnectors-PCCardSockets, Features=Switch, Height Above Board="0.071\"(1.80mm)", Insertion, Removal Method=PushIn,PushOut, Manufacturer URL=http://www.molex.com/, Mounting Feature=Reverse-Bottom, Mounting Type=SurfaceMount,RightAngle, Number of Positions=10(8+2), Online Catalog=microSD™Series, Other Names=WM24066DKR, Packaging=Digi-Reel, RoHS Information=502774-0891CertofCompliance, Series=502774
D1 D2 D3 D4 D5 D6 D7: "No Description Available", Mfr_Name="Diodes Inc", Copyright="Copyright (C) 2023 Ultra Librarian. All rights reserved.", Manufacturer_Part_Number=DESD5V0U1BA-7, RefDes=RefDes, Type=DEV
J1: Package=None, Availability=Unavailable, MP=RJMG163118101NR, Price=None
L1 L2 L3 L4: library part CMP-06042-016283-1, "FIXED IND 1UH 1.6A 55 MOHM SMD", Case Code (Imperial)=1008, Case Code (Metric)=2520, Current Rating=1.6A, DC Resistance (DCR)=69mR, Inductance=1uH, Inductance Tolerance=20%, Max Operating Temperature=125°C, Min Operating Temperature=-55°C, Package Quantity=3000, Self Resonant Frequency=60MHz, Test Frequency=1MHz, Case/Package=1008, Core Material=Ferrite, DC Current=1.6A, Depth=2.2mm, Height=1.2mm, Height - Seated (Max)=0.039inch, Lead Free="Lead Free", Length=2.5mm, Max DC Current=1.6A, Military Standard=Not, Mount="Surface Mount", Packaging="Tape and Reel", Radiation Hardening=No, Rated Current-Max=1.6A, REACH SVHC="No SVHC", RoHS Compliant=Yes, Series=LQM2HP_G0, Shielding=Shielded, Termination=SMD/SMT, Tolerance=20%, Width=2mm
R1 R2 R3 R4 R5 R6 R7 R8 R9 R10 R11 R12 R13 R14 R15 R16 R17 R18 R19 R20 R21 R22 R23 R24 R25 R26 R27 R28 R29 R30 R31 R32 R33 R34 R35 R36 R37 R38 R39 R40 R41 R42 R43 R44 R45 R46 R47 R48 R49 R50 R51 R52 R53 R54 R55 R56 R57 R58 R59 R60 R61 R62 R63 R64: library part CMP-1666-00005-4, "Chip Resistor, 10 KOhm, +/- 1%, 100 mW, -55 to 155 degC, 0603 (1608 Metric), RoHS, Tape and Reel", Manufacturer="Vishay Semiconductor", Max Operating Temperature="155 degC", Min Operating Temperature="-55 degC", Package Quantity=5000, Voltage Rating="75 V", ComponentLink1Description="Manufacturer URL", ComponentLink1URL=http://www.vishay.com/, ComponentLink2Description=Datasheet, ComponentLink2URL=https://datasheet.ciiva.com/11809/0900766b80d98afc-11809037.pdf, DatasheetVersion=06/2012, Height="0.45 mm", Length="1.55 mm", Mounting Technology="Surface Mount", PackageDescription="2-Pin Surface Mount Device, Body 1.575 x 0.85 mm", PackageReference=0603, Packaging="Tape and Reel", REACH SVHC=Unknown, RoHSCompliant=true
U1: "No Description Available", Mfr_Name=STMicroelectronics, RefDes=RefDes, Type=Type
U2: "No Description Available", Mfr_Name="Analog Devices / Maxim Integrated", RefDes=RefDes, Type=Type
U3: library part CMP-2000-06774-1, "1 Gb DDR3L 1866 SDRAM, 64 Mb x 16, 1.07 ns, 1.35 V, -40 to 95 degC, 96-Ball FBGA (TW), RoHS, Tray", Manufacturer=Micron, Max Processing Temp=260, Maximum Operating Current=63mA, Operating Supply Voltage=1.35V, Operating Temperature=-40to95C, Package Description="96-Ball Fine Pitch Ball Grid Array, Body 8 x 14 mm, Pitch 0.8 mm", Package Reference=TW-96, Address Bus Width=13Bit, Data Bus Width=16Bit, Datasheet URL=https://www.micron.com/~/media/documents/products/data-sheet/dram/ddr3/1gb_1_35v_ddr3l.pdf, Datasheet Version="Rev. K, 09/2014", Density=1Gb, Lead Finish=Tin, Manufacturer URL=http://www.micron.com/, Maximum Clock Rate=933MHz, Mounting=SurfaceMount, Mounting Technology=SurfaceMount, Number of Bits per Word=16Bit, Number of I/O Lines=16Bit, Organization=64Mx16, Screening Level=Industrial, Type=DDR3LSDRAM
U5: "No Description Available", Mfr_Name=ISSI, RefDes=RefDes, Type=Memory
U6: "No Description Available", Mfr_Name="Texas Instruments", RefDes=RefDes, Type=Type
Y1: library part CMP-18717-000310-1, "Crystal 25MHz, 10ppm, 10pF, 50Ω", Case/Package=SMD/SMT, ESR (Equivalent Series Resistance)=60R, Frequency=25MHz, Frequency Stability=10ppm, Load Capacitance=10pF, Max Operating Temperature=70°C, Min Operating Temperature=-20°C, Package Quantity=3000, Depth=2.5mm, Frequency Tolerance=10ppm, Height=0.031inch, Length=3.2mm, Mount="Surface Mount", Number of Pins=4, Packaging="Tape and Reel", REACH SVHC="No SVHC", Series=7M, Termination=SMD/SMT, Tolerance=10ppm, Width=0.098inch

## Nets (pads, with @x,y where several pads share a name; then routed paths per layer and width w, separated by ;. In a path a pad name is that pad's centre, name@x,y a point inside that pad or via, vN(x,y) a via of type N, cw(c..) or ccw(c..) an arc to the next point about the centre after c; other vN are vias at no path point)
0.675V: C63.1 C64.1 C65.1 U3.H1 U3.M8
1V2: C7.1 C14.1 C15.1 C16.1 C17.1 C18.1 C19.1 C20.1 C21.1 C22.1 C23.1 C24.1 C25.1 C26.1 C27.1 C28.1 L3.1 R5.1 U1.A16 U1.B16 U1.E7 U1.E9 U1.E11 U1.E13 U1.F4 U1.F6 U1.F8 U1.F10 U1.F12 U1.G5 U1.G7 U1.G9 U1.G11 U1.H4 U1.H6 U1.H8 U1.H10 U1.H12 U1.J7 U1.J9 U1.J11 U1.J13 U1.K8 U1.K10 U1.K12 U1.L9 U1.L11 U1.L13 U1.M10 U1.M12 U1.N11 U1.N13 U1.P12 U1.R13
1V8: C6.1 L2.2 R3.1
1V35: C8.1 C29.1 C30.1 C31.1 C32.1 C33.1 C34.1 C52.1 C53.1 C54.1 C55.1 C56.1 C57.1 C58.1 C59.1 C60.1 C61.1 C62.1 L4.1 R6.1 U1.E15 U1.F14 U1.G15 U1.H14 U1.J15 U1.K14 U1.L15 U1.M14 U1.N15 U1.P14 U1.R15 U1.W16 U3.A1 U3.A8 U3.B2 U3.C1 U3.C9 U3.D2 U3.D9 U3.E9 U3.F1 U3.G7 U3.H2 U3.H9 U3.K2 U3.K8 U3.N1 U3.N9 U3.R1 U3.R9
3V3: C5.1 C69.1 C70.1 C71.1 C72.1 C73.1 C74.1 C75.1 C76.1 C77.1 C78.1 C79.1 C80.1 C81.1 C82.1 C83.1 C84.1 C85.1 CD1.4 D4.2 J1.L1 J1.L4 L1.2 R1.1 R41.2 R42.2 R43.2 R44.1 R44.2 R45.2 R46.2 R47.2 R48.1 R49.1 R50.2 R51.1 R52.1 R53.1 R54.1 R55.1 R56.1 R57.1 R58.1 R59.2 R60.2 R61.2 U1.A12 U1.G13 U1.H3 U1.J5 U1.K6 U1.L3 U1.L5 U1.L7 U1.M4 U1.M6 U1.M8 U1.N1 U1.N2 U1.N3 U1.N5 U1.N7 U1.N9 U1.P6 U1.P8 U1.P10 U1.R7 U1.R9 U1.R11 U1.T15 U1.W12 U1.W15 U5.E4 U5.F2 U5.F3 U5.F4 U5.F5 U5.F6 U5.F7 U5.F8 U5.F9 U5.H3 U5.H8 U5.L2 U5.L4 U5.L7 U5.L9 U5.P3 U5.P8 U6.3 U6.17
+5V: C9.1 C10.1 C11.1 C12.1 R9.1 R10.1 R11.1 R12.1 U2.1 U2.2 U2.7 U2.15 U2.20
DDR_A0: R13.1 U1.H18
DDR_A1: R14.1 U1.M17
DDR_A2: R15.1 U1.G18
DDR_A3: R16.1 U1.F19
DDR_A4: R17.1 U1.P17
DDR_A5: R18.1 U1.H17
DDR_A6: R19.1 U1.N16
DDR_A7: R20.1 U1.E17
DDR_A8: R21.1 U1.R17
DDR_A9: R22.1 U1.G17
DDR_A10: R23.1 U1.M19
DDR_A11: R24.1 U1.M18
DDR_A12: R25.1 U1.L17
DDR_A13: U1.F17
DDR_A14: U1.N18
DDR_A15: U1.L16
DDR_BA0: R26.1 U1.G19
DDR_BA1: R27.1 U1.N17
DDR_BA2: R28.1 U1.J16
DDR_CASN: R34.1 U1.K17
DDR_CKE: R30.1 R38.2 U1.P19
DDR_CLK_N: R29.1 U1.K19 U3.K7
DDR_CLK_P: R29.2 U1.L19 U3.J7
DDR_CSN: R35.1 U1.J18
DDR_DQ0: U1.A17 U3.E3
DDR_DQ1: U1.A18 U3.F7
DDR_DQ2: U1.D18 U3.F2
DDR_DQ3: U1.B17 U3.F8
DDR_DQ4: U1.E18 U3.H3
DDR_DQ5: U1.D17 U3.H8
DDR_DQ6: U1.D19 U3.G2
DDR_DQ7: U1.B18 U3.H7
DDR_DQ8: U1.P18 U3.D7
DDR_DQ9: U1.T17 U3.C3
DDR_DQ10: U1.R18 U3.C8
DDR_DQ11: U1.V19 U3.C2
DDR_DQ12: U1.W18 U3.A7
DDR_DQ13: U1.T18 U3.A2
DDR_DQ14: U1.V18 U3.B8
DDR_DQ15: U1.W17 U3.A3
DDR_LDM: U1.C18 U3.E7
DDR_LDQS_N: U1.B19 U3.G3
DDR_LDQS_P: U1.C19 U3.F3
DDR_ODT: R31.2 U1.H19
DDR_RASN: R33.1 U1.L18
DDR_RESETN: R39.2 U1.G16 U3.T2
DDR_UDM: U1.U18 U3.D3
DDR_UDQS_N: U1.T19 U3.B7
DDR_UDQS_P: U1.U19 U3.C7
DDR_WEN: R32.1 U1.J17
DETECT: CD1.9
eMMC_DS: U5.K5
eMMC_RST_N: R50.1 U5.M5
EN3: R11.2 U2.10 U2.13
EN4: R10.2 U2.12 U2.21
ETH_COL: U6.28
ETH_CRS: U6.29
ETH_MDC: U6.12
ETH_MDIO: U6.11
ETH_PHY_XI: C87.1 Y1.1
ETH_PHY_XO: C88.1 Y1.3
ETH_RX_CLK: U6.19
ETH_RX_DV: U6.18
ETH_RX_ER: U6.20
ETH_RX_LED: R60.1 U6.31
ETH_RXD0: U6.16
ETH_RXD1: U6.15
ETH_RXD2: U6.14
ETH_RXD3: U6.13
ETH_TX_CLK: U6.22
ETH_TX_EN: U6.23
ETH_TX_LED: R61.1 U6.30
ETH_TXD0: U6.24
ETH_TXD1: U6.25
ETH_TXD2: U6.26
ETH_TXD3: U6.27
GND: C1.2 C2.2 C3.2 C4.2 C5.2 C6.2 C9.2 C10.2 C11.2 C12.2 C13.2 C14.2 C15.2 C16.2 C17.2 C18.2 C19.2 C20.2 C21.2 C22.2 C23.2 C24.2 C25.2 C26.2 C27.2 C28.2 C29.2 C30.2 C31.2 C32.2 C33.2 C34.2 C35.2 C36.2 C37.2 C38.2 C39.2 C40.2 C41.2 C42.2 C43.2 C44.2 C45.2 C46.2 C47.2 C48.2 C49.2 C50.2 C51.2 C52.2 C53.2 C54.2 C55.2 C56.2 C57.2 C58.2 C59.2 C60.2 C61.2 C62.2 C63.2 C64.2 C65.2 C66.2 C67.2 C68.2 C69.2 C70.2 C71.2 C72.2 C73.2 C74.2 C75.2 C76.2 C77.2 C78.2 C79.2 C80.2 C81.2 C82.2 C83.2 C84.2 C85.2 C86.2 C87.2 C88.2 C89.2 C90.2 CD1.6 D1.1 D2.1 D3.1 D4.1 D5.1 D6.1 D7.1 J1.S1 J1.S2 R2.2 R4.2 R7.2 R8.2 R36.1 R37.1 R38.1 R39.1 R40.1 R62.1 R63.1 R64.1 U1.A1 U1.A19 U1.B2 U1.B6 U1.C3 U1.C12 U1.C13 U1.C14 U1.C15 U1.C16 U1.C17 U1.D1 U1.D4 U1.D5 U1.D8 U1.E2 U1.E4 U1.E5 U1.E6 U1.E8 U1.E10 U1.E12 U1.E14 U1.E16 U1.F5 U1.F7 U1.F9 U1.F11 U1.F13 U1.F15 U1.G2 U1.G4 U1.G6 U1.G8 U1.G10 U1.G12 U1.G14 U1.H5 U1.H7 U1.H9 U1.H11 U1.H13 U1.H15 U1.J3 U1.J4 U1.J6 U1.J8 U1.J10 U1.J12 U1.J14 U1.K2 U1.K5 U1.K7 U1.K9 U1.K11 U1.K13 U1.K15 U1.L4 U1.L6 U1.L8 U1.L10 U1.L12 U1.L14 U1.M3 U1.M5 U1.M7 U1.M9 U1.M11 U1.M13 U1.M15 U1.N4 U1.N6 U1.N8 U1.N10 U1.N12 U1.N14 U1.P5 U1.P7 U1.P9 U1.P11 U1.P13 U1.P15 U1.R2 U1.R5 U1.R6 U1.R8 U1.R10 U1.R12 U1.R14 U1.R16 U1.T4 U1.U3 U1.U6 U1.U8 U1.U13 U1.U14 U1.U17 U1.V12 U1.V15 U1.W1 U1.W19 U2.4 U2.5 U2.11 U2.17 U2.18 U2.24 U2.25 U2.29 U3.A9 U3.B1 U3.B3 U3.B9 U3.D1 U3.D8 U3.E1 U3.E2 U3.E8 U3.F9 U3.G1 U3.G8 U3.G9 U3.J2 U3.J8 U3.M1 U3.M9 U3.P1 U3.P9 U3.T1 U3.T9 U5.G2 U5.G3 U5.G4 U5.G5 U5.G6 U5.G7 U5.G8 U5.G9 U5.H2 U5.H9 U5.J5 U5.L3 U5.L8 U5.M4 U5.M7 U5.P2 U5.P9 U6.1 U6.33 Y1.2 Y1.4
JTCK: U1.D16
JTDI: U1.D13
JTDO: U1.D14
JTMS: U1.D15
NetC1_1: C1.1 R1.2 R2.1 U2.28
NetC2_1: C2.1 R3.2 R4.1 U2.22
NetC3_1: C3.1 R6.2 R7.1 U2.8
NetC4_1: C4.1 R5.2 R8.1 U2.14
NetC7_2: C7.2 C8.2 L3.2 U2.16
NetC13_1: C13.1 U2.26
NetC66_1: C66.1 U1.J1
NetC67_1: C67.1 U1.D12
NetC68_1: C68.1 U1.J2
NetC86_1: C86.1 U6.2
NetC89_1: C89.1 J1.R1
NetC90_1: C90.1 J1.R6
NetCD1_10: CD1.10 R41.1
NetJ1_L2: J1.L2 R63.2
NetJ1_L3: J1.L3 R64.2
NetL1_1: L1.1 U2.3
NetL2_1: L2.1 U2.19
NetL4_2: L4.2 U2.6
NetR13_2: R13.2 U3.N3
NetR14_2: R14.2 U3.P7
NetR15_2: R15.2 U3.P3
NetR16_2: R16.2 U3.N2
NetR17_2: R17.2 U3.P8
NetR18_2: R18.2 U3.P2
NetR19_2: R19.2 U3.R8
NetR20_2: R20.2 U3.R2
NetR21_2: R21.2 U3.T8
NetR22_2: R22.2 U3.R3
NetR23_2: R23.2 U3.L7
NetR24_2: R24.2 U3.R7
NetR25_2: R25.2 U3.N7
NetR26_2: R26.2 U3.M2
NetR27_2: R27.2 U3.N8
NetR28_2: R28.2 U3.M3
NetR30_2: R30.2 U3.K9
NetR31_1: R31.1 U3.K1
NetR32_2: R32.2 U3.L3
NetR33_2: R33.2 U3.J3
NetR34_2: R34.2 U3.K3
NetR35_2: R35.2 U3.L2
NetR36_2: R36.2 U3.L8
NetR37_2: R37.2 U1.F18
NetR40_2: R40.2 U1.V16
NetR59_1: R59.1 U6.32
NetR62_2: R62.2 U6.10
NetU1_B12: U1.B12 U1.V11
PG1: R12.2 U2.9 U2.27
PG4: R9.2 U2.23
RJ_RD_N: U6.4
RJ_RD_P: J1.R4 U6.5
RJ_TD_N: J1.R3 J1.R5 U6.6
RJ_TD_P: J1.R2 U6.7
SDIO1_CK: CD1.5 D3.2
SDIO1_CMD: CD1.3 D5.2 R45.1
SDIO1_D0: CD1.7 D2.2 R43.1
SDIO1_D1: CD1.8 D1.2 R42.1
SDIO1_D2: CD1.1 D7.2 R47.1
SDIO1_D3: CD1.2 D6.2 R46.1
SDIO2_CK: R58.2 U5.P6
SDIO2_CMD: R57.2 U5.P5
SDIO2_D0: R48.2 U5.K2
SDIO2_D1: R49.2 U5.N2
SDIO2_D2: R51.2 U5.K3
SDIO2_D3: R52.2 U5.N3
SDIO2_D4: R53.2 U5.N8
SDIO2_D5: R54.2 U5.K8
SDIO2_D6: R55.2 U5.N9
SDIO2_D7: R56.2 U5.K9
USB1_D_N: 
USB1_D_P: 
USB2_D_N: 
USB2_D_P: 
VCC: C35.1 C36.1 C37.1 C38.1 C39.1 C40.1 C41.1 C42.1 C43.1 C44.1 C45.1 C46.1 C47.1 C48.1 C49.1 C50.1 C51.1
pads on no net: CD1.11 CD1.12 CD1.13 CD1.14 J1. U1.A2 U1.A3 U1.A4 U1.A5 U1.A6 U1.A7 U1.A8 U1.A9 U1.A10 U1.A11 U1.A13 U1.A14 U1.A15 U1.B1 U1.B3 U1.B4 U1.B5 U1.B7 U1.B8 U1.B9 U1.B10 U1.B11 U1.B13 U1.B14 U1.B15 U1.C1 U1.C2 U1.C4 U1.C5 U1.C6 U1.C7 U1.C8 U1.C9 U1.C10 U1.C11 U1.D2 U1.D3 U1.D6 U1.D7 U1.D9 U1.D10 U1.D11 U1.E1 U1.E3 U1.F1 U1.F2 U1.F3 U1.G1 U1.G3 U1.H1 U1.H2 U1.J19 U1.K1 U1.K3 U1.K4 U1.K18 U1.L1 U1.L2 U1.M1 U1.M2 U1.N19 U1.P1 U1.P2 U1.P3 U1.P4 U1.R1 U1.R3 U1.R4 U1.T1 U1.T2 U1.T3 U1.T5 U1.T6 U1.T7 U1.T8 U1.T9 U1.T10 U1.T11 U1.T12 U1.T13 U1.T14 U1.T16 U1.U1 U1.U2 U1.U4 U1.U5 U1.U7 U1.U9 U1.U10 U1.U11 U1.U12 U1.U15 U1.U16 U1.V1 U1.V2 U1.V3 U1.V4 U1.V5 U1.V6 U1.V7 U1.V8 U1.V9 U1.V10 U1.V13 U1.V14 U1.V17 U1.W2 U1.W3 U1.W4 U1.W5 U1.W6 U1.W7 U1.W8 U1.W9 U1.W10 U1.W11 U1.W13 U1.W14 U3.J1 U3.J9 U3.L1 U3.L9 U3.M7 U3.T3 U3.T7 U5.A1 U5.A2 U5.A9 U5.A10 U5.B1 U5.B10 U5.D2 U5.D3 U5.D4 U5.D5 U5.D6 U5.D7 U5.D8 U5.D9 U5.E2 U5.E3 U5.E5 U5.E6 U5.E7 U5.E8 U5.E9 U5.H4 U5.H5 U5.H6 U5.H7 U5.J2 U5.J3 U5.J4 U5.J6 U5.J7 U5.J8 U5.J9 U5.K4 U5.K6 U5.K7 U5.L5 U5.L6 U5.M2 U5.M3 U5.M6 U5.M8 U5.M9 U5.N4 U5.N5 U5.N6 U5.N7 U5.P4 U5.P7 U5.T1 U5.T10 U5.U1 U5.U2 U5.U9 U5.U10 U6.8 U6.9 U6.21

## Text inside footprints (layer, text, board x,y; h text height)
U1: Top 3D Body "19" at 3916.97,3944.02 h50 r90; Top 3D Body "1" at 3350.04,3944.02 h50 r90; Top 3D Body "W" at 3243.5,3295.55 h50; Top 3D Body "A" at 3243.5,3862.48 h50; Top Overlay "19" at 3916.97,3944.02 h50 r90; Top Overlay "1" at 3350.04,3944.02 h50 r90; Top Overlay "W" at 3243.5,3295.55 h50; Top Overlay "A" at 3243.5,3862.48 h50; Bottom Overlay "19" at 3866.97,3944.02 h50 r270; Bottom Overlay "1" at 3300.04,3944.02 h50 r270; Bottom Overlay "W" at 3268.5,3295.55 h50; Bottom Overlay "A" at 3268.5,3862.48 h50
U2: Top 3D Body "*" at 7985.31,3107.4 h50
U5: Top Overlay "U" at 3915.63,2135.95 h60 r90
U6: Top 3D Body "*" at 8387,2728.74 h50; Top Overlay "*" at 8320,2760 h50